# EAGLE board SBC_Gameduino (EAGLE 9.6.2)
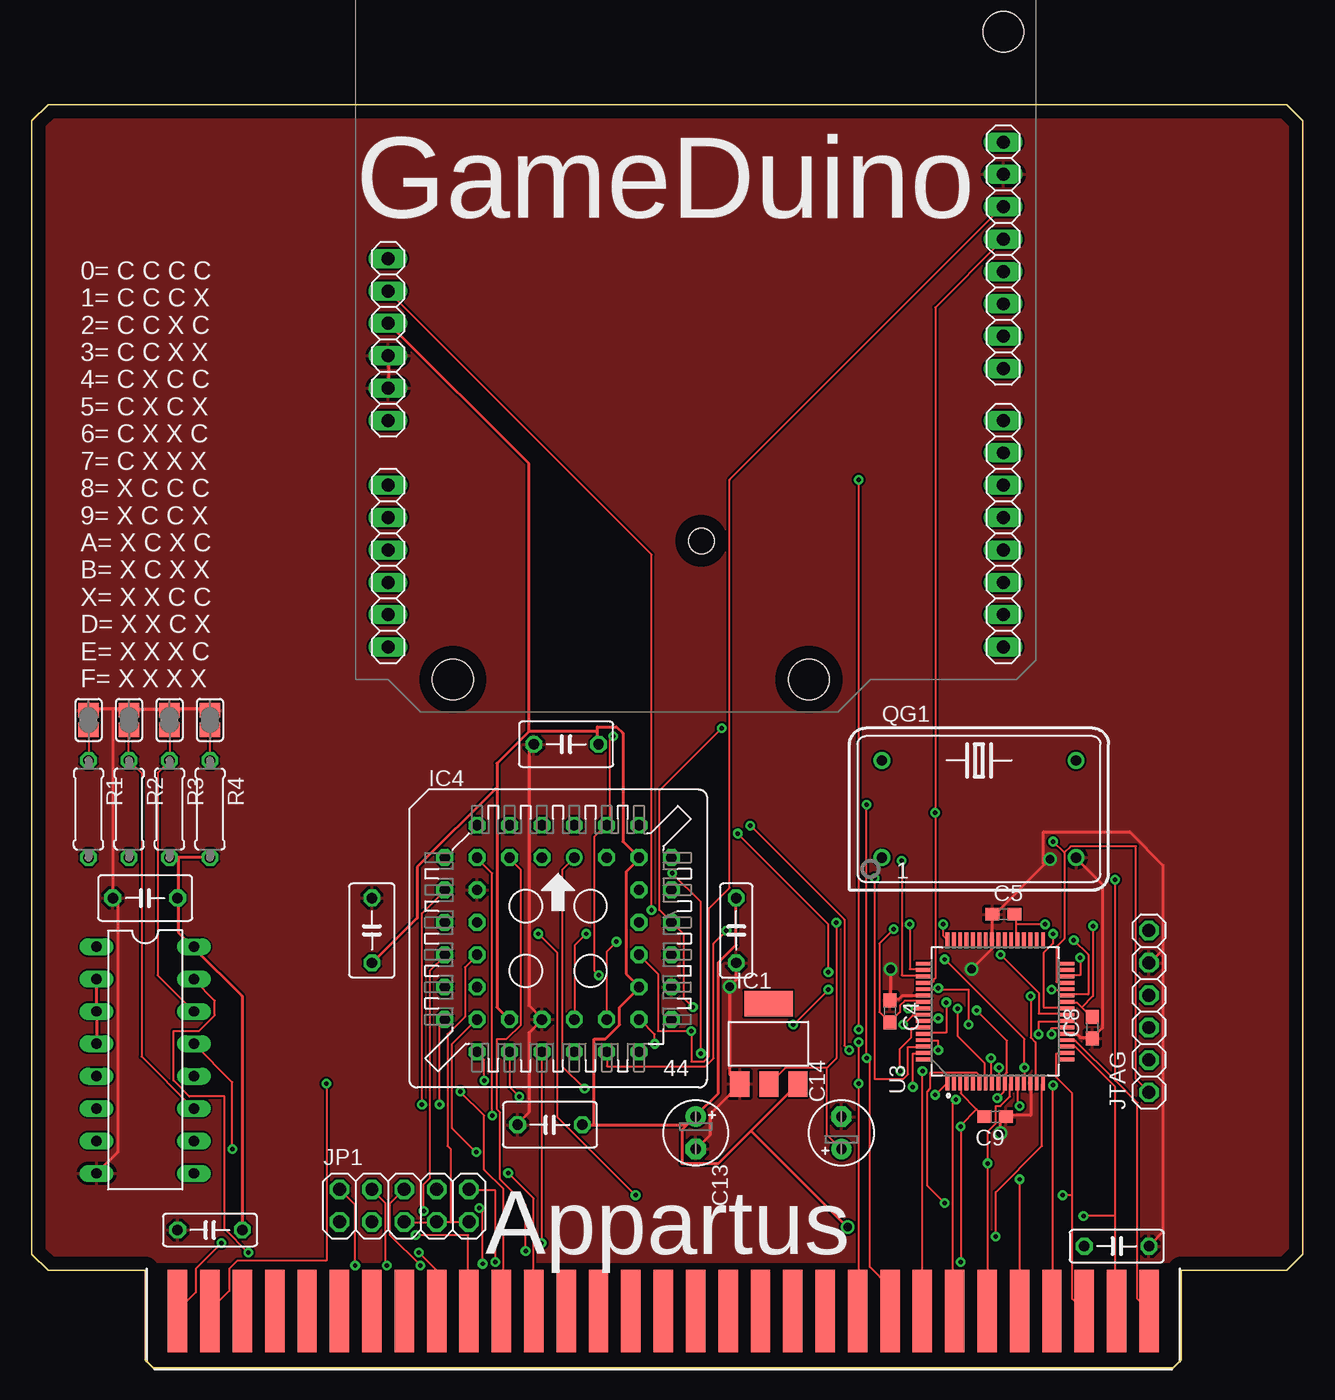
[diagram p0: board, top side]
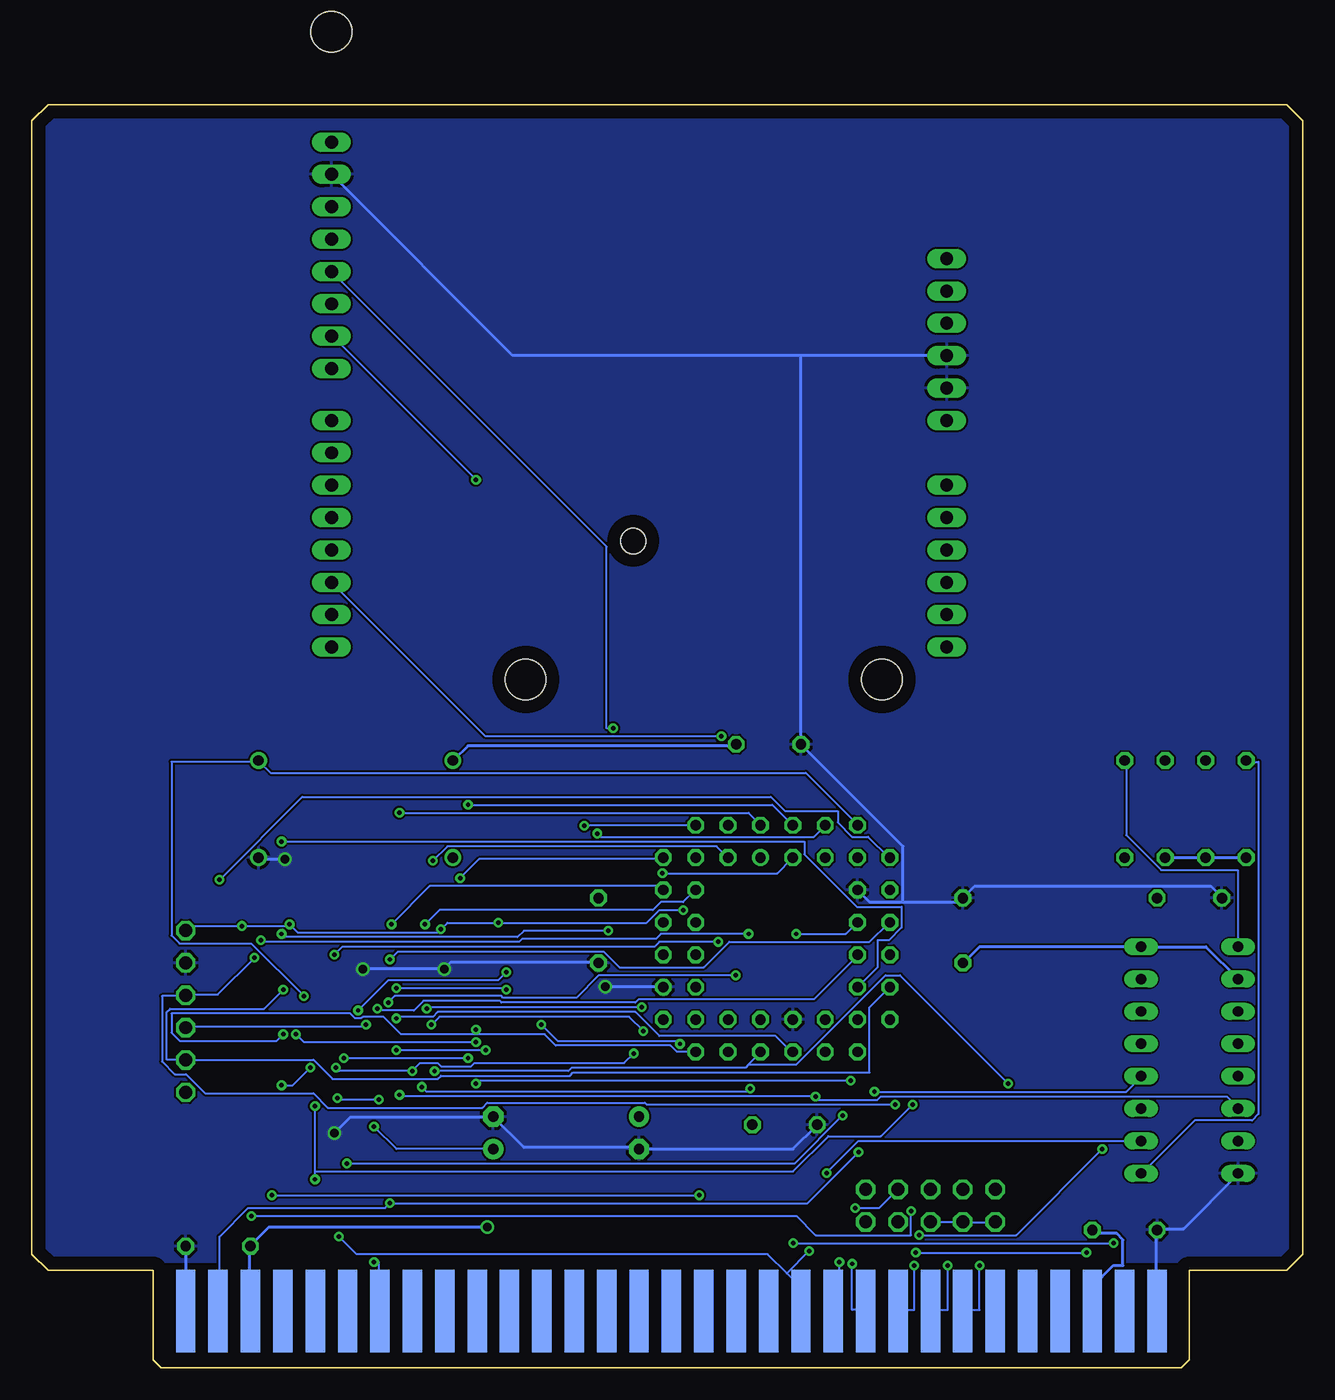
[diagram p1: board, bottom side, seen from below]

Size 99.7 x 99.06 mm. Coordinates in mm from the lower left corner, seen from the top.
Copper layers (1*16): Top 0.035mm / dielectric 1.5mm / Bottom 0.035mm
Design rules "appartus": minimum track width 6mil, minimum drill 0.35mm, track to track 6mil, track to pad 6mil, pad to pad 6mil, via to via 6mil, smd to smd 6mil, copper to edge 40mil, drill to drill 6mil, minimum pad ring 10mil, minimum via ring 8mil, stop-mask expansion 4mil, vias tented up to drill 0mil, thermal gap 10mil
Net classes: 0 default: width 0.152 mm, drill 0.2 mm, clearance 0.152 mm; 1 power: width 0.254 mm, drill 0.66 mm, clearance 0.152 mm to class 0, clearance 0.152 mm; 2 data: width 0.254 mm, drill 0.66 mm, clearance 0.152 mm to class 0, clearance 0.152 mm to class 1, clearance 0.152 mm

## Footprints (pad centres in the part's own frame; a part is rotated, then mirrored left to right if it is on the bottom)
C050-025X075 = drill 0.813 octagon: 1 -2.54,0; 2 2.54,0
C603 = smd 1.1 x 1: 1 -0.85,0; 2 0.85,0
C050-035X075 = drill 0.813 octagon: 1 -2.54,0; 2 2.54,0
E2,5-5 = drill 0.813 pad 1.6: + -1.27,0 | drill 0.813 pad 1.6 octagon: - 1.27,0
SOT223 = smd 1.499 x 2.007: 1 -2.261,-3.15; 2 0.025,-3.15; 3 2.311,-3.15 | smd 3.81 x 2.007: 4 0,3.15
DIL16 = drill 0.813 long: 1 -8.89,-3.81; 2 -6.35,-3.81; 3 -3.81,-3.81; 4 -1.27,-3.81; 5 1.27,-3.81; 6 3.81,-3.81; 7 6.35,-3.81; 8 8.89,-3.81; 9 8.89,3.81; 10 6.35,3.81; 11 3.81,3.81; 12 1.27,3.81; 13 -1.27,3.81; 14 -3.81,3.81; 15 -6.35,3.81; 16 -8.89,3.81
ARDUINO2009 = drill 1.016 long: 1 33.02,2.54; 2 35.56,2.54; 3 38.1,2.54; 4 40.64,2.54; 5 43.18,2.54; 6 45.72,2.54; 7 50.8,2.54; 8 53.34,2.54; 9 55.88,2.54; 10 58.42,2.54; 11 60.96,2.54; 12 63.5,2.54; 13 63.5,50.8; 14 60.96,50.8; 15 58.42,50.8; 16 55.88,50.8; 17 53.34,50.8; 18 50.8,50.8; 19 48.26,50.8; 20 45.72,50.8; 21 41.656,50.8; 22 39.116,50.8; 23 36.576,50.8; 24 34.036,50.8; 25 31.496,50.8; 26 28.956,50.8; 27 26.416,50.8; 28 23.876,50.8 | hole 3.2: 15.24,50.8; 66.04,35.56; 66.04,7.62 | hole 2: 55.17,27.114
S44 = drill 0.813: 1 1.27,6.35 | drill 0.813 octagon: 2 -1.27,8.89; 3 -1.27,6.35; 4 -3.81,8.89; 5 -3.81,6.35; 6 -6.35,8.89; 7 -8.89,6.35; 8 -6.35,6.35; 9 -8.89,3.81; 10 -6.35,3.81; 11 -8.89,1.27; 12 -6.35,1.27; 13 -8.89,-1.27; 14 -6.35,-1.27; 15 -8.89,-3.81; 16 -6.35,-3.81; 17 -8.89,-6.35; 18 -6.35,-8.89; 19 -6.35,-6.35; 20 -3.81,-8.89; 21 -3.81,-6.35; 22 -1.27,-8.89; 23 -1.27,-6.35; 24 1.27,-8.89; 25 1.27,-6.35; 26 3.81,-8.89; 27 3.81,-6.35; 28 6.35,-8.89; 29 8.89,-6.35; 30 6.35,-6.35; 31 8.89,-3.81; 32 6.35,-3.81; 33 8.89,-1.27; 34 6.35,-1.27; 35 8.89,1.27; 36 6.35,1.27; 37 8.89,3.81; 38 6.35,3.81; 39 8.89,6.35; 40 6.35,8.89; 41 6.35,6.35; 42 3.81,8.89; 43 3.81,6.35; 44 1.27,8.89
2X05 = drill 1.016 octagon: 1 -5.08,-1.27; 2 -5.08,1.27; 3 -2.54,-1.27; 4 -2.54,1.27; 5 0,-1.27; 6 0,1.27; 7 2.54,-1.27; 8 2.54,1.27; 9 5.08,-1.27; 10 5.08,1.27
1X06 = drill 1.016 octagon: 1 -6.35,0; 2 -3.81,0; 3 -1.27,0; 4 1.27,0; 5 3.81,0; 6 6.35,0
DIL14S = drill 0.813: 1 -7.62,-3.81; 7 7.62,-3.81; 8 7.62,3.81; 14 -7.62,3.81
0207/7 = drill 0.813 octagon: 1 -3.81,0; 2 3.81,0
SJ = smd 1.168 x 1.6: 1 -0.762,0; 2 0.762,0
APP_2X32_SHORT = smd 1.524 x 6.477: A1 38.1,-44.45; A2 35.56,-44.45; A3 33.02,-44.45; A4 30.48,-44.45; A5 27.94,-44.45; A6 25.4,-44.45; A7 22.86,-44.45; A8 20.32,-44.45; A9 17.78,-44.45; A10 15.24,-44.45; A11 12.7,-44.45; A12 10.16,-44.45; A13 7.62,-44.45; A14 5.08,-44.45; A15 2.54,-44.45; A16 0,-44.45; A17 -2.54,-44.45; A18 -5.08,-44.45; A19 -7.62,-44.45; A20 -10.16,-44.45; A21 -12.7,-44.45; A22 -15.24,-44.45; A23 -17.78,-44.45; A24 -20.32,-44.45; A25 -22.86,-44.45; A26 -25.4,-44.45; A27 -27.94,-44.45; A28 -30.48,-44.45; A29 -33.02,-44.45; A30 -35.56,-44.45; A31 -38.1,-44.45 | smd 1.524 x 6.477 bottom: B1 38.1,-44.45; B2 35.56,-44.45; B3 33.02,-44.45; B4 30.48,-44.45; B5 27.94,-44.45; B6 25.4,-44.45; B7 22.86,-44.45; B8 20.32,-44.45; B9 17.78,-44.45; B10 15.24,-44.45; B11 12.7,-44.45; B12 10.16,-44.45; B13 7.62,-44.45; B14 5.08,-44.45; B15 2.54,-44.45; B16 0,-44.45; B17 -2.54,-44.45; B18 -5.08,-44.45; B19 -7.62,-44.45; B20 -10.16,-44.45; B21 -12.7,-44.45; B22 -15.24,-44.45; B23 -17.78,-44.45; B24 -20.32,-44.45; B25 -22.86,-44.45; B26 -25.4,-44.45; B27 -27.94,-44.45; B28 -30.48,-44.45; B29 -33.02,-44.45; B30 -35.56,-44.45; B31 -38.1,-44.45
VQFP64 = smd 1.17 x 0.3: 1 -5.62,3.75; 2 -5.62,3.25; 3 -5.62,2.75; 4 -5.62,2.25; 5 -5.62,1.75; 6 -5.62,1.25; 7 -5.62,0.75; 8 -5.62,0.25; 9 -5.62,-0.25; 10 -5.62,-0.75; 11 -5.62,-1.25; 12 -5.62,-1.75; 13 -5.62,-2.25; 14 -5.62,-2.75; 15 -5.62,-3.25; 16 -5.62,-3.75; 33 5.62,-3.75; 34 5.62,-3.25; 35 5.62,-2.75; 36 5.62,-2.25; 37 5.62,-1.75; 38 5.62,-1.25; 39 5.62,-0.75; 40 5.62,-0.25; 41 5.62,0.25; 42 5.62,0.75; 43 5.62,1.25; 44 5.62,1.75; 45 5.62,2.25; 46 5.62,2.75; 47 5.62,3.25; 48 5.62,3.75 | smd 0.3 x 1.17: 17 -3.75,-5.62; 18 -3.25,-5.62; 19 -2.75,-5.62; 20 -2.25,-5.62; 21 -1.75,-5.62; 22 -1.25,-5.62; 23 -0.75,-5.62; 24 -0.25,-5.62; 25 0.25,-5.62; 26 0.75,-5.62; 27 1.25,-5.62; 28 1.75,-5.62; 29 2.25,-5.62; 30 2.75,-5.62; 31 3.25,-5.62; 32 3.75,-5.62; 49 3.75,5.62; 50 3.25,5.62; 51 2.75,5.62; 52 2.25,5.62; 53 1.75,5.62; 54 1.25,5.62; 55 0.75,5.62; 56 0.25,5.62; 57 -0.25,5.62; 58 -0.75,5.62; 59 -1.25,5.62; 60 -1.75,5.62; 61 -2.25,5.62; 62 -2.75,5.62; 63 -3.25,5.62; 64 -3.75,5.62

## Placement (x,y rotation side)
C1  100n  [C050-025X075]  13.97,10.8 180 top
C2  100n  [C050-025X075]  85.09,9.53 0 top
C3  100n  [C050-025X075]  55.25,34.29 270 top
C4  100nF  [C603]  67.31,27.94 270 top
C5  100nF  [C603]  76.2,35.56 0 top
C6  [C050-035X075]  8.89,36.83 180 top
C7  [C050-035X075]  26.67,34.29 90 top
C8  100nF  [C603]  83.19,26.67 90 top
C9  100nF  [C603]  75.56,19.69 180 top
C11  [C050-035X075]  40.64,19.05 180 top
C12  [C050-035X075]  41.91,48.9 180 top
C13  [E2,5-5]  52.07,18.42 270 top
C14  [E2,5-5]  63.5,18.42 90 top
IC1  REG1117  [SOT223]  57.79,25.4 0 top
IC2  74HCT85N  [DIL16]  8.89,24.13 270 top
IC3  [ARDUINO2009]  25.4,120.02 270 top
IC4  XC9572XL_44PLCC  [S44]  41.28,33.66 0 top
JP1  [2X05]  29.21,12.7 0 top
JTAG  [1X06]  87.63,27.94 90 top
QG1  [DIL14S]  74.3,43.82 0 top
R1  10k  [0207/7]  4.45,43.82 270 top
R2  10k  [0207/7]  7.62,43.82 270 top
R3  10k  [0207/7]  10.8,43.82 270 top
R4  10k  [0207/7]  13.97,43.82 270 top
SJ1  [SJ]  4.45,50.8 270 top
SJ2  [SJ]  7.62,50.8 270 top
SJ3  [SJ]  10.8,50.8 270 top
SJ4  [SJ]  13.97,50.8 270 top
ST2  [APP_2X32_SHORT]  49.53,48.9 0 top
U3  XC9572XL-10VQG64C64-VQFP-L  [VQFP64]  75.56,27.94 90 top

## Library data of the parts
C1-C3 = rcl
C4 C5 C8 C9 = dp_devices
C6 C7 C11-C14 = rcl; SPICEPREFIX: C
IC1 = burr-brown; MPN: REG1117; OC_FARNELL: 1097566; OC_NEWARK: 14P6981
IC2 = 74xx-eu
IC3 = arduino
IC4 = Xilinx_tirorin
JP1 JTAG = pinhead
QG1 = crystal; OC_FARNELL: unknown; OC_NEWARK: unknown
R1-R4 = rcl; SPICEPREFIX: R
SJ1-SJ4 = jumper
ST2 = TiRoRiN_Libs
U3 = CPLD; CREATED_BY: PCBLayout.com; DIGIKEY_PARTNO: 122-1388-ND; MANUFACTURER: Xilinx Inc; MPN: XC9572XL-10VQG64C; PACKAGE: VQFP-64

## Nets
+3V3: C4.2 C5.2 C8.2 C9.2 C14.+ IC1.2 IC3.2 JTAG.6 ST2.B7 U3.3 U3.26 U3.37 U3.55
+5V [power]: C1.1 C2.1 C3.1 C6.1 C7.1 C11.1 C12.1 C13.+ IC1.3 IC2.2 IC2.3 IC2.4 IC2.16 IC3.3 IC4.21 IC4.32 IC4.41 QG1.14 R1.2 R2.2 R3.2 R4.2 ST2.B3 ST2.B29
A0: IC4.22 ST2.A31 U3.58
A1: IC4.24 ST2.A30 U3.59
A2: ST2.A29
A3: ST2.A28
A4: ST2.A27
A5: ST2.A26
A6: ST2.A25
A7: ST2.A24
A8: IC2.15 ST2.A23
A8_S: IC2.1 R4.1 SJ4.2
A9: IC2.13 ST2.A22
A9_S: IC2.14 R3.1 SJ3.2
A10: IC2.12 ST2.A21
A10_S: IC2.11 R2.1 SJ2.2
A11: IC2.10 ST2.A20
A11_S: IC2.9 R1.1 SJ1.2
A12: ST2.A19
A13: ST2.A18
A14: ST2.A17
A15: ST2.A16
BE: ST2.A11
CIA_CSH: IC2.6 IC4.20 U3.1
CLK: ST2.B30
D0: IC4.2 ST2.A9 U3.8
D1: IC4.3 ST2.A8 U3.9
D2: IC4.4 ST2.A7 U3.10
D3: IC4.8 ST2.A6 U3.11
D4: IC4.9 ST2.A5 U3.12
D5: IC4.11 ST2.A4 U3.13
D6: IC4.12 ST2.A3 U3.18
D7: IC4.13 ST2.A2 U3.19
DIAG: U3.43
EXTCLK: IC4.6 QG1.8 U3.15
GND [power]: C1.2 C2.2 C3.2 C4.1 C5.1 C6.2 C7.2 C8.1 C9.1 C11.2 C12.2 C13.- C14.- IC1.1 IC2.8 IC3.4 IC3.5 IC3.27 IC4.10 IC4.23 IC4.31 JTAG.5 QG1.7 SJ1.1 SJ2.1 SJ3.1 SJ4.1 ST2.B1 ST2.B31 U3.14 U3.21 U3.41 U3.54
IO_CS: IC4.18 ST2.A10 U3.23
IOR: ST2.B14
IOW: ST2.B13
IRQ: IC4.14 JP1.1 JP1.3 JP1.5 JP1.7 JP1.9 U3.7
IRQ2: JP1.2 ST2.B25
IRQ3: JP1.4 ST2.B24
IRQ4: JP1.6 ST2.B23
IRQ5: JP1.8 ST2.B22
IRQ6: JP1.10 ST2.B21
JTAG_TCK: IC4.17 JTAG.4 U3.30
JTAG_TDI: IC4.15 JTAG.2 U3.28
JTAG_TDO: IC4.30 JTAG.3 U3.53
JTAG_TMS: IC4.16 JTAG.1 U3.29
MEMR: ST2.B12
MEMW: ST2.B11
N$29: IC4.29
N$33: IC4.33
N$36: IC4.36
NMI: ST2.B19
PB2/2: U3.4
PB3/5: U3.31
PB3/6: U3.32
PB3/7: U3.33
PB3/8: U3.34
PB3/9: U3.35
PB3/10: U3.36
PB3/11: U3.38
PB3/12: U3.39
PB3/13: U3.40
PB3/14: U3.42
PB4/2: U3.44
PB4/3: U3.45
PB4/4: U3.46
PB4/5: U3.47
PB4/6: U3.49
PHI2: IC4.5 ST2.B20 U3.16
RESET: IC4.19 ST2.B2 U3.6
RW: IC4.7 ST2.A1 U3.20
SPI_INT0: IC3.15 IC4.42 U3.60
SPI_INT1: IC4.40 U3.61
SPI_INT2: IC4.39 U3.62
SPI_INT3: IC4.1 U3.63
SPI_MISO0: IC3.25 IC4.44 U3.52
SPI_MISO1: IC4.43 U3.51
SPI_MISO2: IC4.38 U3.50
SPI_MISO3: IC4.37 U3.48
SPI_MOSI: IC3.24 IC4.35 U3.56
SPI_NSEL0: IC3.22 IC4.28 U3.22
SPI_NSEL1: IC4.27 U3.24
SPI_NSEL2: IC4.26 U3.25
SPI_NSEL3: IC4.25 U3.27
SPI_SCLK: IC3.26 IC4.34 U3.57

## Tracks (layer width: path | path; a pad name or v marks a point on that pad's centre or on a via)
+3V3  (via drill 0.35)
  Top 0.152: 74.11,20.27 72.86,21.52 72.86,22.27 U3.3 | 74.11,20.27 74.61,19.77 C9.2 | 62.36,23.52 59.11,23.52 57.86,22.27 IC1.2 | 62.36,23.52 62.36,18.27 63.48,17.15 C14.+ | 74.11,20.27 72.86,19.02 v72.86,18.9 v72.86,8.27 | U3.55 69.86,28.65 69.73,28.77 68.48,28.77 68.11,28.4 68.11,27.9 67.36,27.15 C4.2 67.23,27.15 66.48,27.9 66.48,33.27 v67.61,34.4 | 82.36,28.27 81.98,28.65 81.23,28.65 U3.26 | 82.36,28.27 83.11,27.52 C8.2 | 77.23,34.77 77.23,33.65 U3.37 | 77.23,34.77 77.23,35.4 77.11,35.52 C5.2 | v79.48,34.77 77.23,34.77 | 82.36,28.27 83.23,29.15 v83.23,34.65 | v48.61,35.9 48.61,63.77 27.98,84.4 IC3.2 | 62.36,23.52 63.11,24.27 v63.11,34.9
  Bottom 0.152: v72.86,18.9 71.11,17.15 C14.+ | v72.86,8.27 72.48,8.27 72.48,4.52 ST2.B7 | JTAG.6 87.61,34.4 87.36,34.65 v83.23,34.65 79.61,34.65 v79.48,34.77 78.86,34.15 67.86,34.15 v67.61,34.4 67.11,34.9 v63.11,34.9 51.48,34.9 50.48,35.9 v48.61,35.9
+5V  (via drill 0.66)
  Top 0.254: 56.42,18.58 53.86,16.02 50.98,16.02 50.98,18.65 51.29,18.96 | 56.42,18.58 59.98,22.15 IC1.3 | 51.29,18.96 51.98,19.65 C13.+ 52.11,19.77 53.86,21.52 53.86,31.77 55.23,33.15 55.23,36.77 C3.1 | 44.11,19.02 51.23,19.02 51.29,18.96 | 44.11,19.02 43.23,19.02 C11.1 | 44.11,19.02 44.11,25.77 44.98,25.77 46.11,26.9 46.11,28.27 47.61,29.77 IC4.32 47.61,29.9 46.61,30.9 46.61,38.9 47.61,39.9 IC4.41 47.61,40.02 46.36,41.27 46.36,49.77 45.86,50.27 44.36,50.27 44.36,49.9 | 56.42,18.58 v63.98,11.02 | IC2.4 5.11,25.52 5.11,27.9 IC2.3 5.11,28.02 5.11,30.4 IC2.2 | 11.48,40.02 13.86,40.02 R4.2 | 11.48,40.02 10.86,40.02 R3.2 | 11.48,40.02 11.48,36.9 C6.1 11.48,36.77 11.48,34.15 12.61,33.02 IC2.16 12.73,32.9 16.48,29.15 16.48,10.9 C1.1 | 36.48,45.4 36.48,47.4 38.98,49.9 | 36.48,45.4 36.48,28.27 37.36,27.4 IC4.21 | 44.36,49.9 38.98,49.9 | 44.36,49.9 44.36,48.9 C12.1 | 38.98,49.9 38.98,70.9 27.98,81.9 IC3.3 | C7.1 26.73,31.77 30.23,35.27 30.23,39.27 36.36,45.4 36.48,45.4
  Bottom 0.254: ST2.B3 82.61,4.52 82.61,9.52 C2.1 82.48,9.65 81.11,11.02 v63.98,11.02 | C1.1 16.48,10.77 16.23,10.52 14.61,10.52 14.11,10.02 14.11,8.02 14.86,8.02 16.48,6.4 16.48,4.52 ST2.B29 | R1.2 4.48,40.02 7.61,40.02 R2.2 7.73,40.02 10.73,40.02 R3.2 | C7.1 26.61,31.77 25.36,33.02 IC2.16 7.61,33.02 5.11,30.52 IC2.2 | QG1.14 66.61,47.65 65.48,48.77 44.61,48.77 44.48,48.9 C12.1
A0  (via drill 0.35)
  Top 0.152: v71.11,27.4 71.11,27.27 69.98,27.27 U3.58 | v14.86,9.77 12.86,7.77 12.86,5.9 11.48,4.52 ST2.A31 | v39.98,9.77 39.98,24.65 IC4.22
  Bottom 0.152: v71.11,27.4 70.98,27.52 68.23,27.52 67.86,27.9 52.36,27.9 50.48,26.02 41.36,26.02 40.11,24.77 IC4.22 | v39.98,9.77 v14.86,9.77
A1  (via drill 0.35)
  Top 0.152: v68.11,23.27 68.11,25.02 68.98,25.9 68.98,26.65 69.86,26.65 U3.59 | v23.11,22.27 23.11,8.4 16.11,8.4 15.48,7.77 15.48,6.02 13.98,4.52 ST2.A30
  Bottom 0.152: v68.11,23.27 57.61,23.27 57.36,23.52 43.73,23.52 43.48,23.77 | 43.48,23.77 42.61,24.65 IC4.24 | v23.11,22.27 31.61,30.77 32.73,30.77 39.73,23.77 43.48,23.77
A8  (via drill 0.35)
  Top 0.152: v16.98,9.02 15.11,10.9 15.11,21.27 12.36,21.27 11.11,22.52 11.11,26.4 13.11,26.4 14.36,27.65 14.36,28.77 12.73,30.4 IC2.15 | v30.36,9.02 31.73,7.65 31.73,4.52 ST2.A23
  Bottom 0.152: v30.36,9.02 v16.98,9.02
A8_S
  Top 0.152: SJ4.2 13.98,50.02 13.98,47.65 R4.1
  Bottom 0.152: IC2.1 5.11,33.02 5.11,39.02 11.11,39.02 13.86,41.77 13.86,47.52 R4.1
A9  (via drill 0.35)
  Top 0.152: v15.73,17.15 15.73,22.4 12.73,25.4 IC2.13 | v30.11,10.4 34.23,10.4 34.23,4.52 ST2.A22
  Bottom 0.152: v15.73,17.15 22.48,10.4 v30.11,10.4
A9_S
  Top 0.152: SJ3.2 10.86,50.02 10.86,47.65 R3.1 10.73,47.52 9.86,46.65 9.86,30.77 12.61,28.02 IC2.14
A10  (via drill 0.35)
  Top 0.152: v33.61,21.65 35.48,19.77 35.48,15.52 36.98,14.02 36.98,4.65 36.86,4.52 ST2.A21
  Bottom 0.152: v33.61,21.65 13.86,21.65 12.73,22.77 IC2.12
A10_S
  Top 0.152: SJ2.2 7.61,50.02 7.61,47.65 R2.1 7.73,47.52 8.61,46.65 8.61,24.4 12.61,20.4 IC2.11
A11  (via drill 0.35)
  Top 0.152: v37.36,15.27 39.36,13.27 39.36,4.52 ST2.A20
  Bottom 0.152: v37.36,15.27 34.86,17.77 12.73,17.77 IC2.10
A11_S
  Top 0.152: SJ1.2 4.48,50.02 4.48,47.65 R1.1
  Bottom 0.152: IC2.9 12.61,15.27 8.48,19.4 3.98,19.4 3.48,19.9 3.48,47.52 4.36,47.52 R1.1
CIA_CSH  (via drill 0.35)
  Top 0.152: v70.86,21.4 71.73,22.27 U3.1 | v38.23,21.27 37.48,22.02 37.48,24.65 IC4.20
  Bottom 0.152: v70.86,21.4 70.73,21.27 v38.23,21.27 37.98,21.02 33.36,21.02 33.11,21.27 5.98,21.27 5.11,20.4 IC2.6
D0  (via drill 0.35)
  Top 0.152: v75.23,24.27 75.23,22.4 U3.8 | ST2.A9 67.23,4.52 67.23,6.4 65.73,7.9 65.73,24.02 v65.48,24.27 v65.48,44.15
  Bottom 0.152: v65.48,24.27 v75.23,24.27 | IC4.2 41.61,44.15 v65.48,44.15
D1  (via drill 0.35)
  Top 0.152: v75.86,23.52 75.86,22.4 U3.9 | v69.86,23.27 69.86,4.52 ST2.A8 | v50.23,38.77 52.48,36.52 v52.48,24.65
  Bottom 0.152: v75.86,23.52 75.61,23.27 v69.86,23.27 69.23,23.9 67.86,23.9 67.61,23.65 65.23,23.65 64.98,23.9 53.23,23.9 v52.48,24.65 | v50.23,38.77 41.23,38.77 40.11,39.9 IC4.3
D2  (via drill 0.35)
  Top 0.152: v75.73,21.15 76.23,21.65 76.23,22.27 U3.10 76.36,22.4 76.36,23.02 76.48,23.15 76.48,25.65 v74.11,28.02 | v72.48,21.02 72.23,20.77 72.23,4.65 72.36,4.52 ST2.A7 | v55.36,41.9 62.48,34.77 v62.48,31.02
  Bottom 0.152: v75.73,21.15 75.61,21.02 v72.48,21.02 | v55.36,41.9 55.11,41.65 38.36,41.65 37.48,42.52 IC4.4 | v62.48,31.02 63.11,30.4 71.73,30.4 v74.11,28.02
D3  (via drill 0.35)
  Top 0.152: U3.11 76.73,22.27 76.73,21.27 75.98,20.52 75.61,20.52 75.61,19.15 74.98,18.52 v74.98,16.02 74.98,4.52 ST2.A6 | v36.11,19.77 36.11,38.77 34.98,39.9 IC4.8
  Bottom 0.152: v36.11,19.77 39.86,16.02 v74.98,16.02
D4  (via drill 0.35)
  Top 0.152: v77.48,20.52 77.36,20.65 77.36,22.27 U3.12 | v77.48,14.77 77.48,4.52 ST2.A5 | v30.61,20.65 30.61,35.65 32.36,37.4 IC4.9
  Bottom 0.152: v77.48,14.77 77.48,15.4 | 77.48,15.4 v77.48,20.52 | v30.61,20.65 33.11,18.15 37.23,18.15 39.98,15.4 77.48,15.4
D5  (via drill 0.35)
  Top 0.152: v80.11,22.15 80.11,4.52 ST2.A4 | U3.13 77.86,22.4 v77.86,23.52 77.86,25.77 v71.61,32.02
  Bottom 0.152: v77.86,23.52 79.23,22.15 v80.11,22.15 | v71.61,32.02 70.98,32.65 54.86,32.65 53.61,31.4 46.98,31.4 44.98,33.4 33.98,33.4 32.48,34.9 IC4.11
D6  (via drill 0.35)
  Top 0.152: 81.61,13.52 81.61,5.4 82.48,4.52 ST2.A3 | 81.61,13.52 81.61,21.52 80.36,22.77 80.36,24.65 81.11,24.65 U3.18 | v39.73,34.02 41.23,32.52 41.23,19.65 v47.36,13.52 | 81.61,13.52 v80.86,13.52
  Bottom 0.152: v39.73,34.02 35.86,34.02 34.98,34.9 IC4.12 | v80.86,13.52 v47.36,13.52
D7  (via drill 0.35)
  Top 0.152: 84.98,11.9 84.98,4.52 ST2.A2 | 84.98,11.9 84.98,22.02 81.86,25.15 81.23,25.15 U3.19 | v30.73,12.27 30.73,14.4 31.23,14.9 31.23,31.15 32.36,32.27 IC4.13 | 84.98,11.9 v82.48,11.9
  Bottom 0.152: v30.73,12.27 30.73,10.4 38.23,10.4 39.73,11.9 v82.48,11.9
EXTCLK  (via drill 0.35)
  Top 0.152: v78.36,29.15 78.36,25.9 78.73,25.52 78.73,22.4 U3.15
  Bottom 0.152: v78.36,29.15 82.48,33.27 88.11,33.27 88.73,33.9 88.73,47.52 81.98,47.52 QG1.8 81.86,47.52 80.98,46.65 38.98,46.65 34.98,42.65 IC4.6
GND  (via drill 0.66)
  Top 0.254: U3.21 81.23,26.15 81.98,26.15 82.23,25.9 83.11,25.9 C8.1 83.23,25.9 83.98,26.65 83.98,37.9 81.98,39.9 QG1.7 | v79.86,39.9 79.42,39.46 | 79.42,39.46 75.48,35.52 C5.1 75.36,35.52 75.36,33.65 U3.41 75.36,33.52 75.36,32.9 v73.73,31.27 | 88.67,32.71 88.73,32.77 88.73,39.4 86.11,42.02 79.36,42.02 79.36,39.52 79.42,39.46 | 88.67,32.71 87.73,31.77 JTAG.5 | C2.2 87.73,9.65 88.73,10.65 88.73,32.65 88.67,32.71 | U3.14 78.36,22.27 78.36,19.77 76.48,19.77 C9.1 76.36,19.65 75.98,19.27 v75.98,18.4 | C11.2 38.11,19.15 38.98,20.02 38.98,26.27 39.98,27.27 IC4.23 39.98,27.4 38.98,28.4 38.98,48.52 39.36,48.9 C12.2 | C13.- 52.11,17.15 53.23,18.27 53.23,19.9 55.48,22.15 IC1.1 55.48,22.27 54.73,23.02 v54.73,29.9 55.23,30.4 55.23,31.65 C3.2 | U3.54 69.86,29.15 68.23,29.15 67.98,28.9 67.36,28.9 C4.1 67.36,29.02 v67.36,31.27 | IC3.5 27.98,76.9 27.98,79.27 IC3.4 | SJ4.1 13.86,51.65 10.86,51.65 SJ3.1 10.73,51.65 7.73,51.65 SJ2.1 7.61,51.65 6.36,51.65 | 6.36,51.65 4.48,51.65 SJ1.1 | 6.36,51.65 6.36,36.9 C6.2 6.36,36.77 6.73,36.4 6.73,16.9 5.11,15.27 IC2.8
  Bottom 0.254: C2.2 87.61,9.52 87.61,4.52 ST2.B1 | v79.86,39.9 81.86,39.9 QG1.7 | v75.98,18.4 74.73,19.65 63.61,19.65 C14.- 63.48,19.65 61.11,17.27 52.11,17.27 C13.- 39.98,17.15 38.11,19.02 C11.2 | C3.2 55.36,31.77 66.86,31.77 v67.36,31.27 v73.73,31.27 | v54.73,29.9 50.23,29.9 IC4.31 | 39.36,79.4 27.98,79.4 IC3.4 | 39.36,79.4 61.98,79.4 76.11,93.52 IC3.27 | IC2.8 5.11,15.15 9.36,10.9 11.36,10.9 C1.2 11.48,10.77 11.48,4.52 ST2.B31 | 31.36,36.52 33.98,36.52 IC4.10 | 31.36,36.52 26.98,36.52 C7.2 25.73,37.77 7.23,37.77 6.36,36.9 C6.2 | 31.36,36.52 31.36,40.9 39.36,48.9 C12.2 39.36,49.02 39.36,79.4
  pour Top: -4.44,102.87 103.51,102.87 103.51,8.26 -4.44,8.26
  pour Bottom: 103.51,102.87 -4.44,102.87 -4.44,8.26 103.51,8.26
IO_CS  (via drill 0.35)
  Top 0.152: v78.98,26.15 78.98,27.15 81.11,27.15 U3.23 | v64.86,25.52 v64.86,22.27 64.86,4.52 ST2.A10 | v35.48,22.52 35.48,24.15 34.98,24.65 IC4.18
  Bottom 0.152: v78.98,26.15 78.36,25.52 v64.86,25.52 | v35.48,22.52 64.61,22.52 v64.86,22.27
IRQ  (via drill 0.35)
  Top 0.152: 32.86,11.4 34.23,11.4 JP1.9 | 32.86,11.4 31.86,11.4 JP1.7 31.73,11.4 29.23,11.4 JP1.5 | v72.61,28.15 72.61,26.02 74.73,23.9 74.73,22.4 U3.7 | 32.86,11.4 32.86,17.15 32.61,17.4 32.61,26.15 33.98,27.52 33.98,31.4 34.86,32.27 IC4.14
  Bottom 0.152: JP1.1 24.23,11.4 26.61,11.4 JP1.3 26.73,11.4 29.11,11.4 JP1.5 | v72.61,28.15 72.48,28.02 69.73,28.02 68.98,28.77 62.98,28.77 62.86,28.65 52.36,28.65 52.11,28.9 38.36,28.9 34.98,32.27 IC4.14
IRQ2  (via drill 0.35)
  Top 0.152: v25.36,8.02 25.36,12.77 24.23,13.9 JP1.2
  Bottom 0.152: v25.36,8.02 25.36,4.52 26.61,4.52 ST2.B25
IRQ3  (via drill 0.35)
  Top 0.152: v27.86,8.02 27.73,8.15 27.73,12.9 26.73,13.9 JP1.4
  Bottom 0.152: v27.86,8.02 27.86,4.52 29.11,4.52 ST2.B24
IRQ4  (via drill 0.35)
  Top 0.152: v30.48,8.02 28.11,10.4 28.11,12.9 29.11,13.9 JP1.6
  Bottom 0.152: v30.48,8.02 30.48,4.52 31.73,4.52 ST2.B23
IRQ5  (via drill 0.35)
  Top 0.152: v35.11,12.52 35.36,12.27 v35.36,8.15
  Bottom 0.152: v35.11,12.52 33.23,12.52 31.86,13.9 JP1.8 | v35.36,8.15 35.36,4.52 34.36,4.52 ST2.B22
IRQ6  (via drill 0.35)
  Top 0.152: v36.36,8.27 36.36,13.9 34.36,13.9 JP1.10
  Bottom 0.152: v36.36,8.27 36.36,4.52 36.73,4.52 ST2.B21
JTAG_TCK  (via drill 0.35)
  Top 0.152: v82.23,32.15 82.23,30.77 81.23,30.77 U3.30 | v31.98,20.65 31.98,26.9 32.36,27.27 IC4.17
  Bottom 0.152: v82.23,32.15 85.11,29.27 87.61,29.27 JTAG.4 87.73,29.15 89.48,29.15 89.48,24.02 88.48,23.02 87.61,23.02 86.11,21.52 77.61,21.52 76.48,20.4 64.36,20.4 63.98,20.77 51.61,20.77 51.48,20.65 v31.98,20.65
JTAG_TDI  (via drill 0.35)
  Top 0.152: v79.98,29.65 81.11,29.65 U3.28
  Bottom 0.152: v79.98,29.65 81.48,28.15 88.86,28.15 89.11,27.9 89.11,24.15 87.73,24.15 JTAG.2 87.61,24.15 77.61,24.15 76.11,22.65 67.86,22.65 67.61,22.9 57.48,22.9 57.23,23.15 33.98,23.15 33.98,28.27 32.48,29.77 IC4.15
JTAG_TDO  (via drill 0.35)
  Top 0.152: 71.11,29.65 73.48,29.65 v73.48,26.9 | 71.11,29.65 69.98,29.65 U3.53 | v48.86,25.4 48.86,26.15 47.73,27.27 IC4.30 | v62.48,29.65 v59.73,26.9 | 71.11,29.65 v71.11,29.77
  Bottom 0.152: v73.48,26.9 73.61,26.77 87.61,26.77 JTAG.3 | v48.86,25.4 49.11,25.65 58.48,25.65 v59.73,26.9 | v62.48,29.65 62.61,29.77 v71.11,29.77
JTAG_TMS  (via drill 0.35)
  Top 0.152: 80.98,40.4 80.98,33.65 80.36,33.02 80.36,30.27 81.11,30.27 U3.29 | 80.98,40.4 81.48,40.9 86.61,40.9 86.61,22.65 87.61,21.65 JTAG.1 | 80.98,40.4 v80.11,41.27
  Bottom 0.152: v80.11,41.27 39.11,41.27 39.11,40.27 34.98,36.15 31.48,36.15 31.48,34.52 32.48,33.52 33.36,33.52 33.36,31.4 34.86,29.9 IC4.16
PHI2  (via drill 0.35)
  Top 0.152: v75.61,10.27 75.61,13.77 79.23,17.4 79.23,22.27 U3.16 | v38.73,9.15 38.73,12.77 36.73,14.77 36.73,20.02 36.48,20.27 36.48,25.77 37.23,25.77 38.36,26.9 38.36,39.02 37.48,39.9 IC4.5
  Bottom 0.152: v75.61,10.27 74.23,8.9 41.98,8.9 40.48,7.4 | 40.48,7.4 39.48,6.4 39.48,4.52 ST2.B20 | 40.48,7.4 v38.73,9.15
RESET  (via drill 0.35)
  Top 0.152: v71.61,12.9 70.23,14.27 70.23,21.65 70.48,21.9 70.48,23.15 74.11,23.15 74.23,23.02 74.23,22.4 U3.6 | v34.86,16.9 32.98,18.77 32.98,25.4 34.86,27.27 IC4.19
  Bottom 0.152: ST2.B2 84.98,4.52 84.98,10.27 82.73,12.52 71.98,12.52 v71.61,12.9 38.86,12.9 v34.86,16.9
RW  (via drill 0.35)
  Top 0.152: 84.98,22.52 86.73,20.77 86.73,5.4 87.61,4.52 ST2.A1 | 84.98,22.52 81.86,25.65 81.23,25.65 U3.20 | 84.98,22.52 v84.98,38.27
  Bottom 0.152: v84.98,38.27 78.48,44.77 41.73,44.77 40.61,43.65 36.48,43.65 36.48,42.77 35.36,41.65 34.11,41.65 32.48,40.02 IC4.7
SPI_INT0  (via drill 0.35)
  Top 0.152: v71.73,28.65 71.73,26.27 69.98,26.27 U3.60 | v44.48,30.77 44.11,31.15 44.11,41.65 44.98,42.52 IC4.42 45.11,42.65 45.36,42.9 45.36,49.27 v45.61,49.52
  Bottom 0.152: v71.73,28.65 71.23,29.15 62.86,29.15 62.73,29.02 56.98,29.02 55.23,30.77 v44.48,30.77 | v45.61,49.52 64.11,49.52 76.11,61.52 IC3.15
SPI_INT1  (via drill 0.35)
  Top 0.152: v71.11,24.9 71.11,25.65 69.98,25.65 U3.61 | v64.11,24.9 63.73,25.27 63.73,35.15 v56.36,42.52
  Bottom 0.152: v64.11,24.9 v71.11,24.9 | v56.36,42.52 47.73,42.52 IC4.40
SPI_INT2  (via drill 0.35)
  Top 0.152: v66.11,38.4 66.11,22.65 68.36,22.65 68.73,23.02 68.73,25.15 69.86,25.15 U3.62
  Bottom 0.152: v66.11,38.4 64.61,39.9 50.23,39.9 IC4.39
SPI_INT3  (via drill 0.35)
  Top 0.152: v69.11,22.02 69.11,24.65 69.86,24.65 U3.63 | v43.36,21.9 41.61,23.65 41.61,39.02 42.48,39.9 IC4.1
  Bottom 0.152: v69.11,22.02 68.73,21.65 43.61,21.65 v43.36,21.9
SPI_MISO0  (via drill 0.35)
  Top 0.152: U3.52 69.98,30.27 70.73,30.27 70.73,30.4 70.86,30.52 v70.86,43.52 70.86,83.15 76.11,88.4 IC3.25
  Bottom 0.152: v70.86,43.52 43.48,43.52 42.61,42.65 IC4.44
SPI_MISO1  (via drill 0.35)
  Top 0.152: v68.23,39.77 68.23,30.77 69.86,30.77 U3.51
  Bottom 0.152: v68.23,39.77 67.11,40.9 45.98,40.9 45.11,40.02 IC4.43
SPI_MISO2  (via drill 0.35)
  Top 0.152: v68.86,34.77 68.86,31.27 69.86,31.27 U3.50
  Bottom 0.152: v68.86,34.77 67.73,35.9 50.98,35.9 50.36,36.52 48.61,36.52 47.73,37.4 IC4.38
SPI_MISO3  (via drill 0.35)
  Top 0.152: U3.48 71.48,33.9 v71.48,34.77
  Bottom 0.152: v71.48,34.77 68.48,37.77 50.48,37.77 50.23,37.52 IC4.37
SPI_MOSI  (via drill 0.35)
  Top 0.152: v68.73,28.15 69.86,28.15 U3.56 | v51.86,28.27 51.11,29.02 51.11,34.02 50.23,34.9 IC4.35 50.11,35.02 49.23,35.9 49.23,45.27 v54.11,50.15
  Bottom 0.152: v68.73,28.15 68.61,28.27 v51.86,28.27 | v54.11,50.15 54.61,50.15 54.61,64.4 76.11,85.9 IC3.24
SPI_NSEL0  (via drill 0.35)
  Top 0.152: v79.98,26.15 79.98,26.65 81.11,26.65 U3.22 | v64.86,26.52 v64.86,69.65
  Bottom 0.152: v79.98,26.15 80.48,25.65 88.11,25.65 88.73,26.27 88.73,27.77 74.73,27.77 74.36,27.4 73.86,27.4 73.73,27.52 72.11,27.52 70.73,26.15 64.86,26.15 | 64.86,26.15 59.48,26.15 58.61,25.27 49.61,25.27 49.11,24.77 47.73,24.77 IC4.28 | v64.86,69.65 76.11,80.9 IC3.22 | 64.86,26.15 v64.86,26.52
SPI_NSEL1  (via drill 0.35)
  Top 0.152: v75.98,32.4 78.98,29.4 78.98,27.77 81.11,27.77 U3.24 | v45.86,33.4 45.11,32.65 45.11,27.4 IC4.27
  Bottom 0.152: v75.98,32.4 75.36,33.02 50.86,33.02 50.48,33.4 v45.86,33.4
SPI_NSEL2  (via drill 0.35)
  Top 0.152: v80.11,34.02 80.11,33.27 79.36,32.52 79.36,28.27 81.11,28.27 U3.25 | v54.48,34.27 53.48,33.27 53.48,24.27 52.86,23.65 45.11,23.65 45.11,24.65 IC4.26
  Bottom 0.152: v80.11,34.02 79.86,33.77 61.61,33.77 61.11,34.27 v54.48,34.27
SPI_NSEL3  (via drill 0.35)
  Top 0.152: v81.73,33.52 82.86,32.4 82.86,29.27 81.23,29.27 U3.27 | v43.48,34.02 42.61,33.15 42.61,27.4 IC4.25
  Bottom 0.152: v81.73,33.52 81.61,33.4 61.48,33.4 61.23,33.65 50.73,33.65 50.36,34.02 v43.48,34.02
SPI_SCLK  (via drill 0.35)
  Top 0.152: v68.36,26.9 69.11,27.65 69.86,27.65 U3.57 | IC4.34 47.73,32.27 49.11,30.9 49.11,26.4 v51.73,26.4 51.73,24.02 52.73,24.02 53.11,24.4 53.11,36.02 54.73,37.65 54.73,69.65 76.11,91.02 IC3.26
  Bottom 0.152: v68.36,26.9 67.73,27.52 52.86,27.52 v51.73,26.4

## Text on the board
tNames: GameDuino | 0= C C C C / 1= C C C X / 2= C C X C / 3= C C X X / 4= C X C C / 5= C X C X / 6= C X X C / 7= C X X X / 8= X C C C / 9= X C C X / A= X C X C / B= X C X X / X= X X C C / D= X X C X / E= X X X C / F= X X X X